# Altium PCB DSP5509_FPGACIII.PcbDoc (part 3 of 3)
Units mm, origin at the board's own origin, x right, y up, seen from the top; angles counter-clockwise.
Board outline 143.99 x 90.04 mm, 2 copper layers (Top Layer, Bottom Layer); 303 components, 256 nets, 1061 pads, 215 vias.
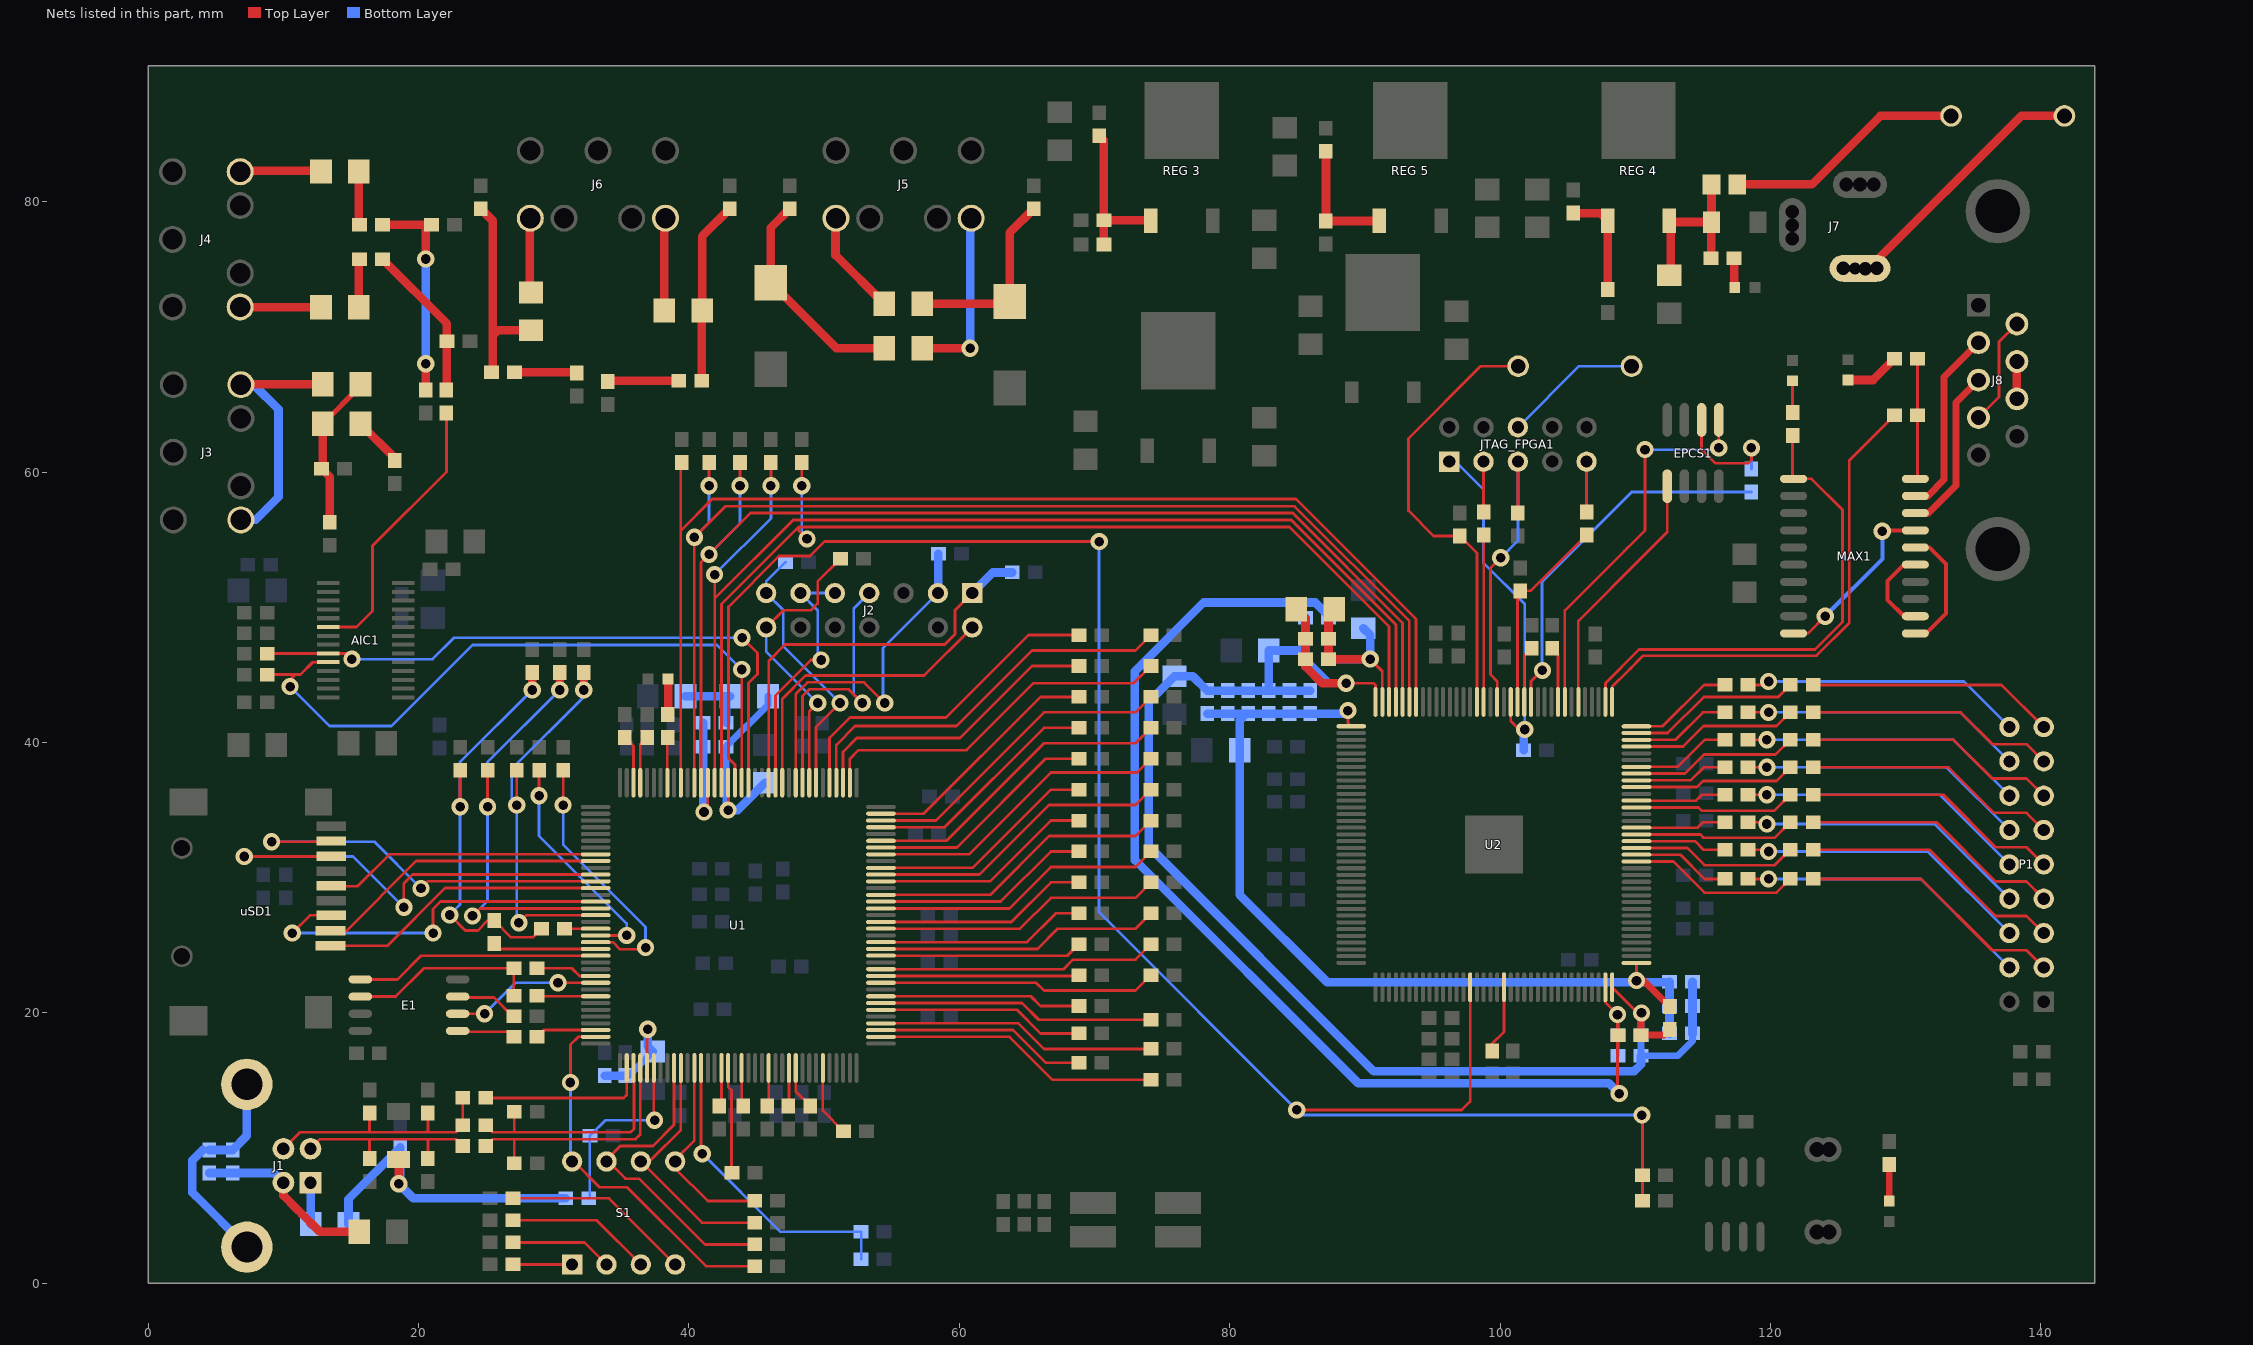
[diagram p3: the nets of this part, all layers, seen from the top]

## Via types
v1: diameter 1.27, hole 0.711, Top Layer to Bottom Layer, 197 vias
v2: diameter 0.66, hole 0.33, Top Layer to Bottom Layer, tented top, 16 vias
v3: diameter 1.5, hole 1, Top Layer to Bottom Layer, 2 vias

## Nets (pads, with @x,y where several pads share a name; then routed paths per layer and width w, separated by ;. In a path a pad name is that pad's centre, name@x,y a point inside that pad or via, vN(x,y) a via of type N, cw(c..) or ccw(c..) an arc to the next point about the centre after c; other vN are vias at no path point) (continued)
NetAIC1_20: AIC1.20 C24.1 | length 20.7
  Top Layer w0.203: AIC1.20@13.364,48.582 AIC1.20@13.323,48.541 15.422,48.541 16.606,49.725 16.606,54.551 22.067,60.012 C24.1@22.067,64.369
NetAIC1_23: AIC1.23 R47.2 U1.89 | length 47.4
  Top Layer w0.203: R47.2@8.82,46.55 8.861,46.591 AIC1.23@13.323,46.591 14.66,46.591 v1(15.082,46.169) ; v1(43.942,47.752) 45.085,46.609 45.085,45.057 44.419,44.391 44.419,37.046 U1.89@44.407,37.034
  Bottom Layer w0.203: v1(15.082,46.169) 21.051,46.169 22.634,47.752 v1(43.942,47.752)
NetAIC1_24: AIC1.24 R48.2 U1.90 | length 52.1
  Top Layer w0.203: R48.2@8.82,45.026 10.891,45.026 ; v1(10.51,44.137) 10.51,44.645 10.891,45.026 ; AIC1.24@13.323,45.941 12.187,45.941 11.272,45.026 10.891,45.026 ; U1.90@43.907,37.034 v1(43.907,45.403)
  Bottom Layer w0.203: v1(10.51,44.137) 13.431,41.216 18.003,41.216 24.008,47.221 42.089,47.221 v1(43.907,45.403)
NetC1_1: C1.1 D1.2 FB1.1 R2.1 | length 24.6
  Top Layer w0.635: v1(18.542,7.366) D1.2@18.542,9.147
  Bottom Layer w0.635: FB1.1@14.831,4.386 14.831,6.234 C1.1@18.669,10.072 18.669,7.493 v1(18.542,7.366) 19.617,6.291 R2.1@30.9,6.291
NetC2_1: C2.1 R5.1 U1.95 | length 9
  Top Layer w0.203: v1(41.117,34.866) 41.407,35.156 U1.95@41.407,37.034 U1.95@41.371,36.998
  Bottom Layer w0.635: R5.1@41.057,41.47 C2.1@41.057,39.692 41.057,35.18 41.057,34.926 v1(41.117,34.866)
NetC2_2: C2.2 C3.2 FB5.1 U1.92 | length 15.3
  Top Layer w0.203: U1.92@42.895,37.022 U1.92@42.907,37.034 v1@42.907,35.132
  Bottom Layer w0.508: v1(42.907,35.005) 42.757,35.155 C2.2@42.757,39.692 45.85,42.785 C3.2@45.85,43.434
  Bottom Layer w0.635: v1(42.907,35.005) 43.62,35.005 FB5.1@45.637,37.022
NetC3_1: C3.1 FB2.2 R5.2 | length 5.4
  Bottom Layer w0.203: R5.2@42.771,41.484 R5.2@42.785,41.47
  Bottom Layer w0.635: FB2.2@39.754,43.434 C3.1@43.05,43.434 42.757,43.141 R5.2@42.757,41.47
NetC4_1: C4.1 J1.3 R1.1 R3.1 R7.1 | length 19
  Top Layer w0.203: J1.3@10.018,9.954 11.24,11.176 16.256,11.176 ; R7.1@16.383,12.612 16.383,11.303 16.256,11.176 ; C4.1@20.701,12.612 20.701,11.303 20.574,11.176 ; R1.1@23.28,13.716 R3.1@23.28,11.684 22.772,11.176 20.574,11.176 ; 16.256,11.176 20.574,11.176
NetC5_1: C5.1 J1.2 R4.1 R8.1 | length 14.7
  Top Layer w0.203: J1.2@12.018,9.954 12.732,10.668 16.256,10.668 ; R8.1@16.383,9.232 16.383,10.541 16.256,10.668 ; C5.1@20.701,9.232 20.701,10.541 20.574,10.668 ; R4.1@23.28,10.16 22.772,10.668 20.574,10.668 ; 16.256,10.668 20.574,10.668
NetC6_1: C6.1 R4.2 U1.4 | length 18.4
  Top Layer w0.203: R4.2@24.98,10.16 25.488,10.668 36.068,10.668 36.407,11.007 U1.4@36.407,15.934 ; C6.1@27.09,8.89 27.09,10.629
NetC7_1: C7.1 R3.2 U1.3 | length 17.2
  Top Layer w0.203: R3.2@24.98,11.684 25.488,11.176 35.687,11.176 35.941,11.43 U1.3@35.941,15.9 ; 27.09,11.215 C7.1@27.09,12.7
NetC8_1: C8.1 C9.1 FB3.1 U1.5 | length 8.9
  Top Layer w0.203: U1.5@36.907,15.934 v1@36.907,18.746
  Bottom Layer w0.508: C9.1@35.306,15.367 35.557,15.367 FB3.1@37.338,17.148
  Bottom Layer w0.635: C8.1@33.782,15.367 C9.1@35.306,15.367 ; v1(36.957,18.796) 36.957,17.529 FB3.1@37.338,17.148
NetC10_1: C10.1 FB4.2 J1.4 R9.2 | length 16.3
  Top Layer w0.635: 10.018,6.619 J1.4@10.018,7.454 10.018,6.492 10.99,5.52 ; 12.446,4.064 11.384,5.126 ; FB4.2@15.618,3.81 12.7,3.81 11.384,5.126 ; 10.99,5.52 11.384,5.126 ; 10.99,5.52 11.384,5.126
  Bottom Layer w0.635: C10.1@4.538,8.164 R9.2@6.26,8.164 9.308,8.164 J1.4@10.018,7.454
NetC10_2: C10.2 J1.5 J1.6 R9.1 | length 16.7
  Bottom Layer w0.203: C10.2@4.05,9.864 C10.2@4.538,9.864
  Bottom Layer w0.635: C10.2@4.05,9.864 3.271,9.085 3.271,6.721 3.502,6.49 J1.5@7.308,2.684 ; C10.2@4.538,9.864 R9.1@6.26,9.864 7.308,10.912 J1.6@7.308,14.724
NetC19_1: C19.1 R28.2 | length 3.8
  Top Layer w0.203: R28.2@18.257,60.862 R28.2@18.257,61.031
  Top Layer w0.635: C19.1@15.72,63.568 R28.2@18.257,61.031
NetC19_2: C19.2 C20.1 FB6.1 R26.2 | length 11.5
  Top Layer w0.203: FB6.1@15.72,66.368 FB6.1@15.72,66.489
  Top Layer w0.381: C19.2@12.92,63.568 FB6.1@15.72,66.368
  Top Layer w0.635: R26.2@12.835,60.266 13.431,59.67 C20.1@13.431,56.29 ; R26.2@12.92,60.351 C19.2@12.92,63.568
NetC23_2: C23.2 R34.2 R43.2 | length 15.4
  Top Layer w0.635: R34.2@17.329,78.3 R43.2@20.963,78.3 ; C23.2@20.543,66.069 v1(20.543,68.013) ; v1(20.543,75.76) R43.2@20.543,77.88
  Bottom Layer w0.635: v1(20.543,68.013) v1(20.543,75.76)
NetC24_2: C24.2 R37.2 R42.2 | length 11.6
  Top Layer w0.635: R37.2@17.329,75.76 22.106,70.983 R42.2@22.106,69.664 C24.2@22.106,66.108
NetC25_2: C25.2 FB9.2 R44.2 | length 16.4
  Top Layer w0.635: R44.2@47.467,79.482 46.07,78.085 C25.2@46.07,74.007 50.921,69.156 FB9.2@54.449,69.156
NetC26_2: C26.2 FB10.2 R45.2 | length 14.1
  Top Layer w0.635: FB10.2@57.249,72.458 63.571,72.458 C26.2@63.723,72.61 63.723,77.704 R45.2@65.501,79.482
NetC28_1: C28.1 R49.1 | length 5.2
  Top Layer w0.635: C28.1@34.044,66.743 R49.1@39.251,66.743
NetC29_1: C29.1 R55.1 | length 4.6
  Top Layer w0.635: R55.1@27.108,67.378 C29.1@31.68,67.378
NetC88_1: "REG 4.3" C88.1 D4.2 F1.2 R66.2 | length 12.5
  Top Layer w0.635: C88.1@112.522,74.552 112.618,74.648 112.618,78.499 115.636,78.499 F1.2@115.636,81.28 ; R66.2@115.609,75.819 115.623,75.833 D4.2@115.623,78.486
NetC91_2: C91.2 C92.2 C93.2 C94.2 C95.2 C96.2 C97.2 C98.2 C99.2 C100.2 C101.2 C102.2 C103.2 C104.2 C105.2 C106.2 C107.2 C108.2 C109.2 C110.2 FB16.1 U2.36 U2.108 | length 114.1
  Top Layer w0.203: v1(88.615,44.391) 90.647,44.391 90.787,44.251 U2.36@90.787,43.003 U2.36@90.787,43.87 ; U2.108@108.287,21.903 v1@110.183,20.007
  Top Layer w0.508: v1@110.42,19.968 C105.2@110.42,18.356 112.11,18.356 C94.2@112.53,18.776
  Top Layer w0.635: C102.2@84.929,49.852 85.606,49.175 C107.2@85.606,47.693 C110.2@85.606,46.169 85.606,45.622 86.837,44.391 v1(88.615,44.391)
  Bottom Layer w0.203: C96.2@81.757,43.844 C97.2@82.9,43.844 C99.2@84.424,43.844 ; C103.2@85.606,49.217 C103.2@85.606,49.344 ; v1@110.42,19.968 v1(110.459,20.007)
  Bottom Layer w0.508: C109.2@85.606,46.169 87.384,44.391 v1(88.615,44.391) ; v1@110.42,19.968 C108.2@110.42,18.356 C104.2@110.42,16.832 113.126,16.832 114.23,17.936 C93.2@114.23,18.483
  Bottom Layer w0.635: C109.2@85.606,46.169 85.606,46.677 ; C103.2@85.606,49.217 C106.2@85.606,47.693 85.606,46.677 ; C101.2@85.948,43.844 C99.2@84.424,43.844 C97.2@82.9,43.844 ; C104.2@110.42,16.832 110.42,16.197 109.912,15.689 90.647,15.689 74.01,32.326 74.01,42.997 C91.2@75.915,44.902 77.27,44.902 C92.2@78.328,43.844 C95.2@79.852,43.844 C96.2@81.376,43.844 C97.2@82.9,43.844 ; C93.2@114.23,18.483 C98.2@114.23,20.515 C100.2@114.23,22.293 ; C97.2@82.9,43.844 82.9,46.801 FB16.1@82.903,46.804 85.479,46.804 85.606,46.677
NetC92_1: C92.1 C93.1 C94.1 C95.1 C96.1 C97.1 C98.1 C99.1 C100.1 C101.1 FB15.1 U2.37 U2.109 | length 74.6
  Top Layer w0.203: U2.37@88.247,41.203 U2.37@88.987,41.203 88.742,41.448 v1(88.742,42.359) ; v1(110.087,22.395) U2.109@110.087,23.703
  Top Layer w0.508: v1(110.087,22.395) 110.611,22.395 C94.1@112.53,20.476
  Bottom Layer w0.203: C95.1@79.979,42.144 81.249,42.144 C96.1@81.376,42.144 81.757,42.144 83.535,42.144 85.44,42.144 ; v1@88.527,42.144 v1(88.742,42.359)
  Bottom Layer w0.635: C92.1@78.328,42.144 C95.1@79.852,42.144 C96.1@81.249,42.144 ; v1@88.527,42.144 C101.1@85.948,42.144 C99.1@84.424,42.144 C97.1@82.9,42.144 C96.1@81.376,42.144 C96.1@81.249,42.144 ; v1(110.087,22.395) v1@109.957,22.265 ; C100.1@112.502,22.265 v1@109.957,22.265 ; C93.1@112.53,18.483 C98.1@112.53,20.515 C100.1@112.53,22.293 ; C96.1@81.249,42.144 80.744,41.639 80.744,39.819 80.744,28.732 87.211,22.265 v1@109.957,22.265
NetC102_1: C102.1 C103.1 C104.1 C105.1 C106.1 C107.1 C108.1 C109.1 C110.1 FB14.1 U2.35 U2.107 | length 104.2
  Top Layer w0.203: v1(90.393,46.169) 91.287,45.275 U2.35@91.287,43.003 ; U2.107@107.787,21.903 107.787,20.774 v1(108.681,19.88) v1@108.681,14.546
  Top Layer w0.635: C102.1@87.729,49.852 87.306,49.429 C107.1@87.306,47.693 C110.1@87.306,46.169 v1(90.393,46.169)
  Bottom Layer w0.203: C103.1@87.306,49.217 C103.1@87.306,49.344 ; v1(90.393,46.169) v1@90.647,46.169 ; C104.1@108.72,16.832 C108.1@108.72,18.356 v1@108.72,19.841
  Bottom Layer w0.635: FB14.1@89.885,48.452 90.393,47.944 v1(90.393,46.169) C109.1@87.306,46.169 C106.1@87.306,47.693 C103.1@87.306,49.217 87.306,49.383 86.329,50.36 78.074,50.36 72.994,45.28 72.994,31.31 89.504,14.8 108.046,14.8 v1(108.808,14.038)
NetD3_1: D3.1 R58.1 | length 2.6
  Top Layer w0.635: R58.1@38.45,42.066 38.469,42.085 D3.1@38.469,44.704
NetD5_1: D5.1 R66.1 | length 2.2
  Top Layer w0.635: R66.1@117.309,75.819 117.309,73.711 D5.1@117.36,73.66
NetD6_2: D6.2 R108.1 | length 2.2
  Top Layer w0.203: R108.1@121.635,64.418 D6.2@121.635,66.655
NetD7_2: D7.2 R109.1 | length 4.1
  Top Layer w0.635: D7.2@125.73,66.814 127.587,66.814 R109.1@129.167,68.394
NetE1_1: E1.1 R27.2 | length 4.6
  Top Layer w0.203: E1.1@22.904,18.61 25.527,18.61 ; 25.789,18.61 25.527,18.61 ; R27.2@27.059,18.229 26.678,18.61 25.527,18.61
NetE1_2: E1.2 U1.135 | length 11.3
  Top Layer w0.203: E1.2@22.904,19.939 v1(24.892,19.939) ; v1@30.136,22.234 v1(30.322,22.234) U1.135@33.107,22.234
  Bottom Layer w0.203: v1(24.892,19.939) 27.187,22.234 v1(30.322,22.234)
NetE1_3: E1.3 R25.2 | length 4.7
  Top Layer w0.203: E1.3@22.904,21.15 25.575,21.15 26.972,19.753 R25.2@27.059,19.753
NetE1_5: E1.5 U1.131 | length 18.9
  Top Layer w0.203: E1.5@15.704,22.479 18.443,22.479 20.198,24.234 24.48,24.234 ; 23.936,24.234 24.48,24.234 ; 26.639,24.234 26.893,24.234 ; U1.131@33.107,24.234 26.893,24.234 ; 24.48,24.234 26.893,24.234
NetE1_6: E1.6 R22.2 R23.2 | length 14.3
  Top Layer w0.203: E1.6@15.704,21.209 18.316,21.209 20.416,23.309 R23.2@27.059,23.309 R22.2@27.059,21.277
NetEPCS1_1: EPCS1.1 U2.8 | length 29.1
  Top Layer w0.203: U2.8@104.787,43.003 104.787,49.768 109.189,54.17 ; 109.443,54.424 109.189,54.17 ; v1(110.713,61.663) 110.713,55.694 109.189,54.17 ; v1(116.174,61.79) EPCS1.1@116.174,63.859
  Bottom Layer w0.203: v1(110.713,61.663) 116.047,61.663 v1(116.174,61.79)
NetEPCS1_2: EPCS1.2 R119.2 | length 8.9
  Top Layer w0.203: EPCS1.2@114.904,63.859 114.904,61.663 115.92,60.647 118.333,60.647 118.587,60.901 v1(118.587,61.79)
  Bottom Layer w0.203: R119.2@118.587,60.227 v1(118.587,61.79)
NetEPCS1_5: EPCS1.5 U2.6 | length 19.3
  Top Layer w0.203: U2.6@105.76,42.976 U2.6@105.787,43.003 105.787,48.99 110.684,53.887 ; 111.085,54.288 110.684,53.887 ; EPCS1.5@112.364,58.959 112.364,55.567 110.684,53.887
NetF1_1: F1.1 S3.2 | length 17.9
  Top Layer w0.635: F1.1@117.536,81.28 123.063,81.28 128.127,86.344 S3.2@133.357,86.344
NetFB1_2: FB1.2 J1.1 | length 3.1
  Bottom Layer w0.635: FB1.2@12.031,4.386 J1.1@12.031,7.441
NetFB6_2: FB6.2 J3.2 J3.5 | length 19.4
  Top Layer w0.635: J3.5@6.997,66.489 FB6.2@12.92,66.489
  Bottom Layer w0.635: J3.2@6.869,56.468 7.954,56.468 9.652,58.166 9.652,64.643 7.827,66.468 J3.5@6.869,66.468
NetFB7_1: FB7.1 R34.1 | length 3.9
  Top Layer w0.635: R34.1@15.593,78.336 FB7.1@15.593,82.237
NetFB7_2: FB7.2 J4.5 | length 5.7
  Top Layer w0.635: J4.5@6.997,82.284 FB7.2@12.746,82.284
NetFB8_1: FB8.1 R37.1 | length 3.5
  Top Layer w0.635: FB8.1@15.593,72.204 R37.1@15.593,75.724
NetFB8_2: FB8.2 J4.2 | length 5.8
  Top Layer w0.635: J4.2@6.997,72.204 FB8.2@12.793,72.204
NetFB9_1: FB9.1 J5.5 | length 12.9
  Top Layer w0.635: FB9.1@57.249,69.156 v1(60.802,69.156)
  Bottom Layer w0.635: v1(60.802,69.156) J5.5@60.802,78.547
NetFB10_1: FB10.1 J5.2 | length 7.6
  Top Layer w0.635: J5.2@50.849,78.594 50.849,76.058 FB10.1@54.449,72.458
NetFB11_1: FB11.1 J6.5 | length 6.7
  Top Layer w0.635: FB11.1@38.193,71.95 38.193,78.544 J6.5@38.243,78.594
NetFB11_2: FB11.2 R49.2 R57.2 | length 13.5
  Top Layer w0.635: R49.2@40.951,66.743 FB11.2@40.951,71.908 ; FB11.2@40.993,71.95 40.993,77.453 R57.2@43.022,79.482
NetFB12_1: FB12.1 J6.2 | length 5.3
  Top Layer w0.635: J6.2@28.243,78.594 28.243,73.36 FB12.1@28.321,73.282
NetFB12_2: FB12.2 R55.2 R56.2 | length 15.5
  Top Layer w0.635: R56.2@24.607,79.482 25.493,78.596 25.493,70.104 ; R55.2@25.408,67.378 25.493,67.463 25.493,70.104 ; FB12.2@28.321,70.482 25.871,70.482 25.493,70.104
NetJ2_1: J2.1 R10.1 U1.86 | length 31.7
  Top Layer w0.203: U1.86@45.904,37.037 U1.86@45.907,37.034 45.907,44.704 ; 45.907,45.593 45.907,45.339 ; J2.1@60.96,51.054 59.69,49.784 59.69,48.006 58.928,47.244 47.117,47.244 45.907,46.034 45.907,45.339 ; 45.907,44.704 45.907,45.339 ; 45.907,44.704 45.907,45.339
  Bottom Layer w0.635: J2.1@60.96,51.054 62.484,52.578 R10.1@63.92,52.578
NetJ2_2: J2.2 U1.84 | length 22.4
  Top Layer w0.203: U1.84@46.907,37.034 46.907,43.224 48.641,44.958 57.404,44.958 J2.2@60.96,48.514
NetJ2_3: J2.3 R11.1 U1.82 | length 27
  Top Layer w0.203: U1.82@47.907,37.034 47.907,43.589 48.768,44.45 52.959,44.45 v1(54.483,42.926)
  Bottom Layer w0.203: v1(54.483,42.926) 54.356,43.053 54.356,46.99 J2.3@58.42,51.054 ; R11.1@58.42,53.555 R11.1@58.459,53.594
  Bottom Layer w0.635: J2.3@58.42,51.054 58.459,51.093 R11.1@58.459,53.975
NetJ2_7: J2.7 U1.81 | length 20.3
  Top Layer w0.203: U1.81@48.407,37.034 48.407,43.434 48.915,43.942 51.816,43.942 v1(52.832,42.926)
  Bottom Layer w0.203: v1(52.832,42.926) 52.197,43.561 52.197,49.911 J2.7@53.34,51.054
NetJ2_9: J2.9 J2.11 U1.85 | length 19
  Top Layer w0.203: U1.85@46.407,37.034 46.407,43.486 49.022,46.101 v1(49.784,46.101)
  Bottom Layer w0.203: v1(49.784,46.101) 49.53,46.355 49.53,49.784 J2.11@48.26,51.054 J2.9@50.8,51.054
NetJ2_13: J2.13 R12.1 U1.79 | length 20.3
  Top Layer w0.203: U1.79@49.407,37.034 49.407,41.152 v1(51.181,42.926)
  Bottom Layer w0.203: 46.99,47.752 46.99,48.133 ; R12.1@47.156,53.34 45.72,51.904 J2.13@45.72,51.054 46.99,49.784 46.99,48.133 ; v1(51.181,42.926) 46.99,47.117 46.99,48.133
NetJ2_14: J2.14 R13.1 U1.80 | length 21.9
  Top Layer w0.203: J2.14@45.72,48.514 46.99,49.784 49.022,49.784 49.53,50.292 49.53,51.904 R13.1@51.22,53.594 ; U1.80@48.907,37.034 48.907,42.303 v1(49.53,42.926)
  Bottom Layer w0.203: J2.14@45.72,48.514 45.72,46.736 v1(49.53,42.926)
NetJ7_1: J7.1 J7.1A J7.1B pad.1 pad.3 S3.1 | length 19.2
  Top Layer w0.635: pad.1@127.254,75.057 138.541,86.344 S3.1@141.739,86.344
NetJ8_2: J8.2 MAX1.19 | length 13.8
  Top Layer w0.508: MAX1.19@130.707,58.234 131.64,58.234 132.842,59.436 132.842,67.03 J8.2@135.384,69.572
NetJ8_3: J8.3 MAX1.18 | length 12.4
  Top Layer w0.508: MAX1.18@130.707,56.964 131.699,56.964 133.731,58.996 133.731,65.149 J8.3@135.384,66.802
NetJ8_4: J8.4 J8.6 | length 8.1
  Top Layer w0.203: J8.4@135.384,64.032 136.906,65.554 136.906,69.639 J8.6@138.224,70.957
NetJ8_7: J8.7 J8.8 | length 2.8
  Top Layer w0.635: J8.8@138.224,65.417 J8.7@138.224,68.187
NetJTAG_FPGA1_1: JTAG_FPGA1.1 R115.1 U2.16 | length 26.7
  Top Layer w0.203: U2.16@100.787,43.003 100.787,41.58 101.405,40.962 v1(101.823,40.962)
  Bottom Layer w0.203: JTAG_FPGA1.1@96.235,60.774 96.706,60.774 98.775,58.705 98.775,53.281 101.823,50.233 v1(101.823,40.962)
  Bottom Layer w0.635: R115.1@101.735,39.438 101.735,40.874 v1(101.823,40.962)
NetJTAG_FPGA1_3: JTAG_FPGA1.3 R113.2 | length 3.7
  Top Layer w0.203: R113.2@98.775,57.052 JTAG_FPGA1.3@98.775,60.774
NetJTAG_FPGA1_5: JTAG_FPGA1.5 R112.1 U2.18 | length 24.9
  Top Layer w0.203: U2.18@99.787,43.003 99.787,44.522 99.283,45.026 99.283,52.9 v1(100.045,53.662) ; R112.1@101.315,57.052 JTAG_FPGA1.5@101.315,60.774
  Bottom Layer w0.203: v1(100.045,53.662) 101.315,54.932 101.315,58.293 ; 101.315,55.948 101.315,58.293 ; JTAG_FPGA1.5@101.315,60.774 101.315,58.293
NetJTAG_FPGA1_6: JTAG_FPGA1.6 S4.2 | length 10.3
  Bottom Layer w0.203: JTAG_FPGA1.6@101.315,63.314 105.835,67.834 S4.2@109.721,67.834
NetJTAG_FPGA1_9: JTAG_FPGA1.9 R114.2 | length 3.7
  Top Layer w0.203: R114.2@106.395,57.052 JTAG_FPGA1.9@106.395,60.774
NetMAX1_1: MAX1.1 R108.2 U2.2 | length 36.9
  Top Layer w0.203: U2.2@107.787,43.003 107.787,44.386 110.287,46.886 123.286,46.886 125.318,48.918 125.318,57.218 123.032,59.504 MAX1.1@121.607,59.504 ; MAX1.1@121.635,59.532 R108.2@121.635,62.718
NetMAX1_10: MAX1.10 MAX1.17 | length 13.5
  Top Layer w0.203: MAX1.10@121.607,48.074 MAX1.10@121.707,48.074 122.778,48.074 v1(124.048,49.344)
  Top Layer w0.305: v1(128.27,55.626) 128.338,55.694 MAX1.17@130.707,55.694
  Bottom Layer w0.305: v1(124.048,49.344) 128.27,53.566 v1(128.27,55.626)
NetMAX1_11: MAX1.11 MAX1.16 | length 9.2
  Top Layer w0.305: MAX1.16@130.707,54.424 131.758,54.424 132.969,53.213 132.969,49.53 131.513,48.074 MAX1.11@130.807,48.074
NetMAX1_12: MAX1.12 MAX1.15 | length 9.2
  Top Layer w0.305: 128.905,50.292 MAX1.12@129.853,49.344 ; 128.905,52.197 MAX1.15@129.862,53.154 ; MAX1.12@130.707,49.344 MAX1.12@129.853,49.344 ; MAX1.15@130.707,53.154 MAX1.15@129.862,53.154 ; MAX1.12@129.853,49.344 128.651,50.546 128.651,51.943 MAX1.15@129.862,53.154
NetMAX1_20: MAX1.20 R109.2 R111.2 | length 8.8
  Top Layer w0.203: MAX1.20@130.867,59.564 R111.2@130.867,64.203 R109.2@130.867,68.394
NetP1_4: P1.4 R134.2 | length 22
  Top Layer w0.203: R134.2@118.333,29.913 v1(119.857,29.913)
  Bottom Layer w0.203: v1(119.857,29.913) 131.123,29.913 P1.4@137.668,23.368
NetP1_6: P1.6 R132.2 | length 21.9
  Top Layer w0.203: R132.2@118.333,32.072 119.73,32.072 v1(119.857,31.945)
  Bottom Layer w0.203: v1(119.857,31.945) 131.631,31.945 P1.6@137.668,25.908
NetP1_8: P1.8 R130.2 | length 21.7
  Top Layer w0.203: R130.2@118.333,34.104 119.603,34.104 v1(119.73,33.977)
  Bottom Layer w0.203: v1(119.73,33.977) 132.139,33.977 P1.8@137.668,28.448
NetP1_10: P1.10 R128.2 | length 21.5
  Top Layer w0.203: R128.2@118.333,36.136 v1(119.73,36.136)
  Bottom Layer w0.203: v1(119.73,36.136) 132.52,36.136 P1.10@137.668,30.988
NetP1_12: P1.12 R126.2 | length 21.3
  Top Layer w0.203: R126.2@118.333,38.168 v1(119.73,38.168)
  Bottom Layer w0.203: v1(119.73,38.168) 133.028,38.168 P1.12@137.668,33.528
NetP1_14: P1.14 R124.2 | length 21
  Top Layer w0.203: R124.2@118.333,40.2 v1(119.73,40.2)
  Bottom Layer w0.203: v1(119.73,40.2) 133.536,40.2 P1.14@137.668,36.068
NetP1_16: P1.16 R122.2 | length 20.8
  Top Layer w0.203: R122.2@118.333,42.232 v1(119.857,42.232)
  Bottom Layer w0.203: v1(119.857,42.232) 134.044,42.232 P1.16@137.668,38.608
NetP1_18: P1.18 R120.2 | length 20.7
  Top Layer w0.203: R120.2@118.333,44.264 v1@119.857,44.264
  Bottom Layer w0.203: v1(119.857,44.518) 134.298,44.518 P1.18@137.668,41.148
NetR1_2: R1.2 U1.2 | length 13.6
  Top Layer w0.203: R1.2@24.98,13.716 35.179,13.716 35.407,13.944 U1.2@35.407,15.934 35.407,14.805
NetR2_2: R2.2 R6.1 U1.6 | length 13.8
  Top Layer w0.203: U1.6@37.407,15.934 37.407,12.123 v1(37.465,12.065)
  Bottom Layer w0.203: R2.2@32.6,6.291 32.678,6.369 R6.1@32.678,10.922 33.821,12.065 v1(37.465,12.065)
NetR14_1: R14.1 S1.8 U1.143 | length 30.5
  Top Layer w0.203: v1(31.242,14.859) 31.242,17.653 31.823,18.234 U1.143@33.107,18.234 ; S1.8@31.432,9.08 33.401,7.112 35.433,7.112 41.275,1.27 R14.1@44.87,1.27
  Bottom Layer w0.203: 31.242,11.811 v1(31.242,14.859) 31.242,9.144 S1.8@31.369,9.017
NetR15_1: R15.1 S1.7 U1.9 | length 23.8
  Top Layer w0.203: U1.9@38.907,15.934 38.907,11.729 37.338,10.16 34.925,10.16 33.909,9.144 35.306,7.747 36.322,7.747 41.19,2.879 R15.1@44.87,2.879
NetR16_1: R16.1 S1.6 U1.10 | length 18.8
  Top Layer w0.203: S1.6@36.449,9.144 37.211,9.144 39.407,11.34 U1.10@39.407,15.934 ; S1.6@36.576,9.144 36.576,8.89 40.979,4.487 R16.1@44.87,4.487
NetR17_1: R17.1 S1.5 U1.12 | length 14.9
  Top Layer w0.203: U1.12@40.407,15.934 40.407,10.562 38.989,9.144 38.989,8.509 41.402,6.096 R17.1@44.87,6.096
NetR18_2: R18.2 S1.1 | length 4.4
  Top Layer w0.203: R18.2@26.981,1.397 S1.1@31.369,1.397
NetR19_2: R19.2 S1.2 | length 7.6
  Top Layer w0.203: R19.2@26.981,3.028 32.278,3.028 S1.2@33.909,1.397
NetR20_2: R20.2 S1.3 | length 10.8
  Top Layer w0.203: R20.2@26.981,4.66 33.186,4.66 S1.3@36.449,1.397
NetR21_2: R21.2 S1.4 | length 14
  Top Layer w0.203: R21.2@26.981,6.291 34.095,6.291 S1.4@38.989,1.397
NetR22_1: R22.1 U1.137 | length 4.4
  Top Layer w0.203: R22.1@28.759,21.277 28.802,21.234 U1.137@33.107,21.234
NetR23_1: R23.1 U1.134 | length 4.6
  Top Layer w0.203: R23.1@28.759,23.309 31.338,23.309 31.913,22.734 U1.134@33.107,22.734
NetR24_1: R24.1 R29.2 U1.124 | length 33.7
  Top Layer w0.203: v1(24.003,27.178) 24.559,27.734 26.512,27.734 ; v1(25.115,35.247) R29.2@25.115,37.953 ; 25.527,27.734 26.512,27.734 ; U1.124@33.107,27.734 26.512,27.734
  Top Layer w0.635: v1(30.449,43.883) R24.1@30.449,45.192
  Bottom Layer w0.203: v1(24.003,27.178) 25.115,28.29 v1(25.115,35.247) 25.115,38.549 v1(30.449,43.883)
NetR27_1: R27.1 U1.142 | length 4.6
  Top Layer w0.203: R27.1@28.759,18.229 29.264,18.734 U1.142@33.107,18.734
NetR30_1: R30.1 R36.2 U1.125 | length 29.3
  Top Layer w0.203: v1(27.274,35.374) R36.2@27.274,37.953 ; v1(27.432,26.67) 27.996,27.234 U1.125@33.107,27.234 U1.125@33.095,27.246
  Top Layer w0.635: v1(32.227,43.883) R30.1@32.227,45.192
  Bottom Layer w0.203: v1@26.893,35.374 26.893,38.041 32.227,43.375 v1(32.227,43.883) ; v1(27.274,35.374) 27.274,26.828 v1(27.432,26.67)
NetR31_1: R31.1 R32.1 R33.1 R38.2 | length 32.5
  Top Layer w0.203: v1(22.321,27.246) 23.464,26.103 24.392,26.103 25.115,26.826 ; v1(23.083,35.247) R38.2@23.083,37.953 R38.2@23.083,37.66 ; R31.1@25.623,26.826 26.854,25.595 27.655,25.595 ; 27.401,25.595 27.655,25.595 ; R33.1@29.091,26.23 28.456,25.595 27.655,25.595
  Top Layer w0.635: v1(28.417,43.883) R32.1@28.417,45.192
  Bottom Layer w0.203: v1(22.321,27.246) 23.083,28.008 23.083,30.48 ; 23.083,29.532 23.083,30.48 ; v1(28.417,43.883) 23.083,38.549 v1(23.083,35.247) 23.083,30.48
NetR31_2: R31.2 U1.130 | length 7.6
  Top Layer w0.203: R31.2@25.623,25.126 26.015,24.734 U1.130@33.107,24.734
NetR33_2: R33.2 U1.127 | length 2.3
  Top Layer w0.203: R33.2@30.791,26.23 33.103,26.23 U1.127@33.107,26.234
NetR35_2: R35.2 U1.129 | length 20.3
  Top Layer w0.203: v1@30.576,35.247 v1(30.703,35.374) R35.2@30.703,37.953 ; U1.129@33.107,25.234 34.386,25.234 34.914,24.706 35.656,24.706 ; 35.148,24.706 35.656,24.706 ; v1(36.799,24.833) 36.672,24.706 35.656,24.706
  Bottom Layer w0.203: v1(30.703,35.374) 30.703,32.453 36.799,26.357 v1(36.799,24.833)
NetR39_2: R39.2 U1.128 | length 17.2
  Top Layer w0.203: v1(28.925,36.068) R39.2@28.925,37.953 ; U1.128@33.107,25.734 v1(35.402,25.734)
  Bottom Layer w0.203: v1(28.925,36.068) 28.925,33.088 35.402,26.611 v1(35.402,25.734)
NetR46_1: R46.1 RESET.1 | length 2.7
  Top Layer w0.508: RESET.1@128.778,6.084 R46.1@128.778,8.802
NetR50_1: R50.1 U1.93 U2.34 | length 80.9
  Top Layer w0.203: U1.93@42.407,37.034 42.407,50.253 48.102,55.948 ; v1(48.356,58.996) R50.1@48.356,60.725 ; v1(48.737,55.059) 48.102,55.694 48.102,55.948 ; U2.34@91.787,43.003 91.79,43.006 91.79,48.582 84.424,55.948 48.102,55.948 ; R50.1@48.356,60.725 48.356,60.901 R50.1@48.356,60.725
  Bottom Layer w0.203: v1(48.356,58.996) 48.356,55.44 v1(48.737,55.059)
NetR51_1: R51.1 U1.94 U2.33 | length 87.1
  Top Layer w0.203: U1.94@41.907,37.034 41.907,50.642 ; v1(41.907,52.42) 41.907,50.642 ; v1(46.07,58.996) R51.1@46.07,60.725 ; U2.33@92.287,43.003 92.298,43.014 92.298,48.709 84.551,56.456 47.721,56.456 41.907,50.642
  Bottom Layer w0.203: v1(41.907,52.42) 46.07,56.583 v1(46.07,58.996)
NetR52_1: R52.1 U1.96 U2.32 | length 87.2
  Top Layer w0.203: U1.96@40.907,37.034 40.907,52.265 ; 40.907,52.773 40.907,52.265 ; v1(43.784,58.996) R52.1@43.784,60.725 ; U2.32@92.787,43.003 92.787,48.855 84.666,56.976 44.558,56.976 v1(41.498,53.916) 40.907,53.325 40.907,52.265
  Bottom Layer w0.203: v1(41.498,53.916) 43.784,56.202 v1(43.784,58.996)
NetR53_1: R53.1 U1.97 U2.31 | length 87.5
  Top Layer w0.203: U1.97@40.407,37.034 v1(40.407,55.186) 42.693,57.472 84.805,57.472 93.287,48.99 U2.31@93.287,43.003 U2.31@93.314,43.03 ; v1(41.498,58.996) R53.1@41.498,60.725
  Bottom Layer w0.203: v1(40.407,55.186) 41.498,56.277 v1(41.498,58.996)
NetR54_1: R54.1 U1.99 U2.30 | length 89
  Top Layer w0.203: U1.99@39.407,37.034 39.407,55.694 ; R54.1@39.466,60.666 R54.1@39.466,60.725 39.407,60.666 39.407,55.694 ; U2.30@93.822,43.038 U2.30@93.787,43.003 93.787,49.125 84.896,58.017 41.73,58.017 39.407,55.694
NetR58_2: R58.2 U1.101 | length 3.3
  Top Layer w0.203: U1.101@38.407,37.034 38.407,40.323 R58.2@38.45,40.366
NetR59_2: R59.2 R60.2 U1.13 | length 22.6
  Top Layer w0.203: U1.13@40.907,15.934 40.902,15.929 40.902,9.681 v1(40.99,9.593)
  Bottom Layer w0.203: v1(40.99,9.593) 46.773,3.81 R59.2@52.744,3.81 R60.2@52.744,1.778
NetR61_2: R61.2 U1.105 | length 3.5
  Top Layer w0.203: U1.105@36.407,37.034 36.407,39.847 R61.2@36.926,40.366
NetR62_2: R62.2 U1.106 | length 3.6
  Top Layer w0.203: R62.2@35.275,40.366 35.907,39.734 U1.106@35.907,37.034
NetR63_1: "REG 3.1" R63.1 R64.2 R65.2 | length 11.7
  Top Layer w0.635: R63.1@70.358,84.875 70.7,84.533 R65.2@70.7,78.613 ; R64.2@70.7,76.835 R65.2@70.7,78.613 ; 74.169,78.596 74.152,78.613 R65.2@70.7,78.613
NetR67_1: "REG 4.1" R67.1 R68.2 | length 7.9
  Top Layer w0.635: R67.1@105.41,79.16 107.387,79.16 107.951,78.596 107.951,73.495 R68.2@107.95,73.494
NetR69_1: "REG 5.1" R69.1 R70.2 | length 9.1
  Top Layer w0.635: R69.1@87.122,83.732 R70.2@87.122,78.574 91.038,78.574 91.06,78.596
NetR71_2: R71.2 U1.57 | length 21.7
  Top Layer w0.203: U1.57@54.207,27.734 63.703,27.734 66.771,30.802 73.033,30.802 R71.2@74.176,31.945
NetR72_1: R72.1 U1.67 | length 23.4
  Top Layer w0.203: U1.67@54.207,32.734 59.051,32.734 66.263,39.946 73.033,39.946 R72.1@74.176,41.089
NetR73_2: R73.2 U1.58 | length 16.2
  Top Layer w0.203: U1.58@54.235,28.262 U1.58@54.207,28.234 63.06,28.234 66.771,31.945 R73.2@68.842,31.945
NetR74_1: R74.1 U1.69 | length 17.7
  Top Layer w0.203: U1.69@54.207,33.734 58.908,33.734 66.263,41.089 R74.1@68.842,41.089
NetR75_2: R75.2 U1.59 | length 22.2
  Top Layer w0.203: U1.59@54.207,28.734 62.29,28.734 66.644,33.088 73.033,33.088 R75.2@74.176,34.231
NetR76_1: R76.1 U1.70 | length 23.8
  Top Layer w0.203: U1.70@54.207,34.234 58.265,34.234 66.263,42.232 73.033,42.232 R76.1@74.176,43.375
NetR77_2: R77.2 U1.61 | length 16.5
  Top Layer w0.203: U1.61@54.207,29.734 62.274,29.734 66.771,34.231 R77.2@68.842,34.231
NetR78_1: R78.1 U1.71 | length 18.2
  Top Layer w0.203: U1.71@54.207,34.734 57.368,34.734 66.009,43.375 R78.1@68.842,43.375
NetR79_2: R79.2 U1.62 | length 22.6
  Top Layer w0.203: U1.62@54.207,30.234 61.504,30.234 66.644,35.374 73.033,35.374 R79.2@74.176,36.517
NetR80_1: R80.1 U1.74 | length 26.9
  Top Layer w0.203: U1.74@51.907,37.034 51.907,38.798 52.547,39.438 60.548,39.438 65.501,44.391 72.906,44.391 R80.1@74.176,45.661
NetR81_2: R81.2 U1.63 | length 17
  Top Layer w0.203: U1.63@54.207,30.734 60.988,30.734 66.771,36.517 R81.2@68.842,36.517
NetR82_1: R82.1 U1.75 | length 22.3
  Top Layer w0.203: U1.75@51.407,37.034 51.407,39.314 52.42,40.327 60.04,40.327 65.374,45.661 R82.1@68.842,45.661
NetR83_2: R83.2 U1.65 | length 22.9
  Top Layer w0.203: U1.65@54.207,31.734 60.718,31.734 66.771,37.787 73.16,37.787 R83.2@74.176,38.803
NetR84_1: R84.1 U1.76 | length 29.4
  Top Layer w0.203: U1.76@50.907,37.034 50.907,39.83 52.293,41.216 59.786,41.216 65.374,46.804 73.033,46.804 R84.1@74.176,47.947
NetR85_2: R85.2 U1.66 | length 17.4
  Top Layer w0.203: U1.66@54.207,32.234 59.821,32.234 66.39,38.803 R85.2@68.842,38.803
NetR86_1: R86.1 U1.77 | length 24.9
  Top Layer w0.203: U1.77@50.407,37.034 50.407,40.346 51.912,41.851 59.024,41.851 65.12,47.947 R86.1@68.842,47.947
NetR87_2: R87.2 U1.31 | length 5.3
  Top Layer w0.203: U1.31@49.907,15.934 49.907,12.78 R87.2@51.443,11.244
NetR88_2: R88.2 U1.17 | length 8.1
  Top Layer w0.203: U1.17@42.907,15.934 42.907,14.534 43.149,14.292 R88.2@43.149,7.981
NetR89_1: R89.1 U1.55 | length 15.8
  Top Layer w0.203: U1.55@54.207,26.734 63.846,26.734 66.771,29.659 R89.1@68.842,29.659
NetR90_2: R90.2 U1.16 | length 2.9
  Top Layer w0.203: R90.2@42.26,13.11 42.407,13.257 U1.16@42.407,15.934 U1.16@42.387,15.914
NetR91_1: R91.1 U1.54 | length 21.4
  Top Layer w0.203: U1.54@54.207,26.234 64.489,26.234 66.771,28.516 73.033,28.516 R91.1@74.176,29.659
NetR92_2: R92.2 U1.19 | length 2.9
  Top Layer w0.203: R92.2@43.907,13.114 R92.2@43.911,13.11 ; U1.19@43.911,15.93 U1.19@43.907,15.934 43.907,13.241 R92.2@44.038,13.11
NetR93_1: R93.1 U1.52 | length 15.5
  Top Layer w0.203: U1.52@54.207,25.234 65.013,25.234 67.152,27.373 R93.1@68.842,27.373
NetR94_1: R94.1 U1.51 | length 21.1
  Top Layer w0.203: U1.51@54.207,24.734 65.783,24.734 67.279,26.23 73.033,26.23 R94.1@74.176,27.373
NetR95_1: R95.1 U1.50 | length 15
  Top Layer w0.203: U1.50@54.207,24.234 67.989,24.234 R95.1@68.842,25.087
NetR96_1: R96.1 U1.48 | length 20.7
  Top Layer w0.203: U1.48@54.207,23.234 67.712,23.234 68.422,23.944 73.033,23.944 R96.1@74.176,25.087
NetR97_1: R97.1 U1.47 | length 14.7
  Top Layer w0.203: U1.47@54.207,22.734 68.775,22.734 R97.1@68.842,22.801
NetR98_2: R98.2 U1.23 | length 2.9
  Top Layer w0.203: R98.2@45.816,13.11 45.907,13.201 U1.23@45.907,15.934
NetR99_1: R99.1 U1.46 | length 20.7
  Top Layer w0.203: U1.46@54.207,22.234 65.687,22.234 66.263,21.658 73.033,21.658 R99.1@74.176,22.801
NetR100_1: R100.1 U1.44 | length 14.9
  Top Layer w0.203: U1.44@54.207,21.234 65.29,21.234 66.009,20.515 R100.1@68.842,20.515
NetR101_1: R101.1 U1.43 | length 20.5
  Top Layer w0.203: U1.43@54.242,20.769 U1.43@54.207,20.734 64.647,20.734 65.882,19.499 R101.1@74.176,19.499
NetR102_1: R102.1 U1.42 | length 15.4
  Top Layer w0.203: U1.42@54.207,20.234 64.258,20.234 66.009,18.483 R102.1@68.842,18.483
NetR103_2: R103.2 U1.26 | length 2.9
  Top Layer w0.203: R103.2@47.34,13.11 47.407,13.177 U1.26@47.407,15.934
NetR104_1: R104.1 U1.40 | length 20.8
  Top Layer w0.203: U1.40@54.207,19.234 64.369,19.234 66.263,17.34 R104.1@74.176,17.34
NetR105_2: R105.2 U1.27 | length 3.3
  Top Layer w0.203: U1.27@47.907,15.934 47.907,14.194 R105.2@48.991,13.11
NetR106_1: R106.1 U1.39 | length 15.6
  Top Layer w0.203: U1.39@54.207,18.734 63.98,18.734 66.39,16.324 R106.1@68.842,16.324
NetR107_1: R107.1 U1.38 | length 21.3
  Top Layer w0.203: U1.38@54.207,18.234 63.718,18.234 66.898,15.054 R107.1@74.176,15.054
NetR110_1: R110.1 R114.1 U2.15 | length 18.2
  Top Layer w0.203: U2.15@101.287,43.003 101.287,51.034 R110.1@101.473,51.22 102.263,51.22 R114.1@106.395,55.352 104.109,53.066
NetR111_1: R111.1 U2.1 | length 37.7
  Top Layer w0.203: U2.1@108.287,43.003 108.287,44.124 109.463,45.3 ; 109.697,45.534 109.463,45.3 ; R111.1@129.167,64.203 125.826,60.862 125.826,48.836 123.413,46.423 110.586,46.423 109.463,45.3
NetR113_1: R113.1 U2.20 | length 12.4
  Top Layer w0.203: U2.20@98.787,43.003 R113.1@98.787,55.452
NetR116_2: R116.2 U2.92 | length 5.1
  Top Layer w0.203: R116.2@99.41,17.174 99.41,17.721 100.287,18.598 U2.92@100.287,21.903
NetR117_2: R117.2 U2.14 | length 4.2
  Top Layer w0.203: U2.14@101.787,43.003 101.787,46.426 R117.2@102.331,46.97
NetR118_2: R118.2 U2.9 | length 4.1
  Top Layer w0.203: R118.2@103.855,46.97 104.287,46.538 U2.9@104.287,43.003
NetR119_1: R119.1 U2.13 | length 28.6
  Top Layer w0.203: U2.13@102.287,44.093 U2.13@102.287,43.003 102.287,44.533 v1@103.093,45.339
  Bottom Layer w0.203: v1@103.093,45.339 103.093,51.884 109.736,58.527 R119.1@118.587,58.527
  other v1: 103.124,45.339
NetR120_1: R120.1 U2.144 | length 7.8
  Top Layer w0.203: U2.144@110.087,41.203 112.014,41.203 115.075,44.264 R120.1@116.633,44.264
NetR121_1: R121.1 U2.143 | length 12.8
  Top Layer w0.203: U2.143@110.087,40.703 112.395,40.703 115.067,43.375 120.57,43.375 R121.1@121.459,44.264
NetR122_1: R122.1 U2.142 | length 7.4
  Top Layer w0.203: U2.142@110.087,40.203 112.974,40.203 115.003,42.232 115.92,42.232 R122.1@116.633,42.232
NetR123_1: R123.1 U2.141 | length 12.4
  Top Layer w0.203: U2.141@110.087,39.703 113.538,39.703 115.051,41.216 120.443,41.216 R123.1@121.459,42.232
NetR124_1: R124.1 U2.138 | length 7.4
  Top Layer w0.203: U2.138@110.087,38.203 113.133,38.203 115.13,40.2 R124.1@116.633,40.2
NetR125_1: R125.1 U2.137 | length 12.4
  Top Layer w0.203: U2.137@110.087,37.703 113.665,37.703 115.073,39.111 120.37,39.111 R125.1@121.459,40.2
NetR126_1: R126.1 U2.136 | length 6.9
  Top Layer w0.203: U2.136@110.087,37.203 114.097,37.203 115.062,38.168 R126.1@116.633,38.168
NetR127_1: R127.1 U2.135 | length 12
  Top Layer w0.203: U2.135@110.087,36.703 114.554,36.703 115.003,37.152 120.443,37.152 R127.1@121.459,38.168
NetR128_1: R128.1 U2.133 | length 6.7
  Top Layer w0.203: U2.133@110.087,35.703 114.502,35.703 114.935,36.136 R128.1@116.633,36.136
NetR129_1: R129.1 U2.132 | length 12
  Top Layer w0.203: U2.132@110.087,35.203 113.507,35.203 114.681,35.203 114.935,34.949 120.272,34.949 R129.1@121.459,36.136
NetR130_1: R130.1 U2.129 | length 6.7
  Top Layer w0.203: U2.129@110.087,33.703 114.602,33.703 115.003,34.104 R130.1@116.633,34.104
NetR131_1: R131.1 U2.128 | length 12
  Top Layer w0.203: U2.128@110.087,33.203 114.808,33.203 115.062,32.949 120.304,32.949 R131.1@121.459,34.104
NetR132_1: R132.1 U2.127 | length 6.8
  Top Layer w0.203: U2.127@110.087,32.703 114.427,32.703 115.058,32.072 R132.1@116.633,32.072
NetR133_1: R133.1 U2.126 | length 12.4
  Top Layer w0.203: U2.126@110.087,32.203 113.847,32.203 115.121,30.929 120.316,30.929 R133.1@121.459,32.072
NetR134_1: R134.1 U2.125 | length 7.3
  Top Layer w0.203: U2.125@110.087,31.703 113.331,31.703 115.121,29.913 R134.1@116.633,29.913
NetR135_1: R135.1 U2.124 | length 12.7
  Top Layer w0.203: U2.124@110.087,31.203 112.815,31.203 115.121,28.897 120.443,28.897 R135.1@121.459,29.913
NetR145_2: R145.2 R146.1 U1.91 U2.87 | length 144.3
  Top Layer w0.203: U1.91@43.407,37.034 43.407,38.354 42.926,38.835 42.926,50.038 46.677,53.789 48.963,53.789 50.038,54.864 v1(70.358,54.864) ; v1(84.963,12.827) 97.155,12.827 97.787,13.459 U2.87@97.787,21.903 ; R146.1@110.529,6.096 R145.2@110.529,8.001 v1@110.529,12.446
  Bottom Layer w0.203: v1@70.327,54.864 70.327,27.463 v1(84.963,12.827) 85.344,12.446 87.98,12.446 v1(110.49,12.446)
NetR147_1: R147.1 S4.1 U2.21 | length 33.1
  Top Layer w0.203: U2.21@98.287,43.003 98.287,54.025 R147.1@97.028,55.284 95.084,55.284 93.218,57.15 93.218,62.484 98.568,67.834 S4.1@101.339,67.834
NetU1_116: U1.116 uSD1.5 | length 20.3
  Top Layer w0.203: uSD1.5@13.815,29.368 15.494,29.368 17.86,31.734 20.035,31.734 U1.116@33.107,31.734
NetU1_117: U1.117 uSD1.2 | length 21.7
  Top Layer w0.203: uSD1.2@13.538,26.035 14.63,26.035 19.829,31.234 20.695,31.234 U1.117@33.107,31.234
NetU1_119: U1.119 uSD1.7 | length 36.3
  Top Layer w0.203: v1(7.112,31.568) uSD1.7@13.815,31.568 ; v1(18.923,27.813) 18.923,29.591 19.566,30.234 U1.119@33.107,30.234
  Bottom Layer w0.203: v1(7.112,31.568) 15.168,31.568 v1(18.923,27.813)
NetU1_120: U1.120 uSD1.8 | length 30.5
  Top Layer w0.203: v1(9.144,32.668) uSD1.8@13.815,32.668 ; v1(20.193,29.21) 20.717,29.734 21.94,29.734 ; 21.733,29.734 21.94,29.734 ; U1.120@33.107,29.734 21.94,29.734
  Bottom Layer w0.203: v1(9.144,32.668) 16.735,32.668 v1(20.193,29.21)
NetU1_121: U1.121 uSD1.1 | length 22
  Top Layer w0.203: 14.681,24.968 13.765,24.968 17.705,24.968 21.971,29.234 U1.121@33.107,29.234
NetU1_123: U1.123 uSD1.3 | length 28.1
  Top Layer w0.203: v1(10.668,25.908) 11.978,27.218 uSD1.3@13.815,27.218 ; v1(21.082,25.908) 21.082,27.686 21.63,28.234 U1.123@33.107,28.234
  Bottom Layer w0.203: v1(10.668,25.908) v1(21.082,25.908)
P1_4: P1.17 R121.2 | length 18.3
  Top Layer w0.203: R121.2@123.159,44.264 137.092,44.264 P1.17@140.208,41.148
P1_6: P1.15 R123.2 | length 18.6
  Top Layer w0.203: R123.2@123.159,42.232 134.044,42.232 136.398,39.878 138.938,39.878 P1.15@140.208,38.608
P1_8: P1.13 R125.2 | length 18.8
  Top Layer w0.203: R125.2@123.159,40.2 133.536,40.2 136.398,37.338 138.938,37.338 P1.13@140.208,36.068
P1_10: P1.11 R127.2 | length 19
  Top Layer w0.203: R127.2@123.159,38.168 133.155,38.168 136.525,34.798 138.938,34.798 P1.11@140.208,33.528
P1_12: P1.9 R129.2 | length 19.2
  Top Layer w0.203: R129.2@123.159,36.136 132.774,36.136 136.652,32.258 138.938,32.258 P1.9@140.208,30.988
P1_14: P1.7 R131.2 | length 19.4
  Top Layer w0.203: R131.2@123.159,34.104 132.266,34.104 136.652,29.718 138.938,29.718 P1.7@140.208,28.448
P1_16: P1.5 R133.2 | length 19.8
  Top Layer w0.203: R133.2@123.286,31.945 R133.2@123.159,32.072 131.758,32.072 136.652,27.178 138.938,27.178 P1.5@140.208,25.908
P1_18: P1.3 R135.2 | length 19.8
  Top Layer w0.203: R135.2@123.159,29.913 131.123,29.913 136.398,24.638 138.938,24.638 P1.3@140.208,23.368
pads on no net: ADM.5 ADM.6 ADM.8 AIC1.2 AIC1.25 AIC1.26 J2.6 J3.0 J3.3 J3.4 J4.0 J4.1 J4.3 J4.4 J5.0 J5.1 J5.3 J5.4 J6.0 J6.1 J6.3 J6.4 J8.1 J8.9 JTAG_FPGA1.7 JTAG_FPGA1.8 MAX1.2 MAX1.3 MAX1.4 MAX1.5 MAX1.8 MAX1.13 MAX1.14 U1.14 U1.15 U1.21 U1.22 U1.25 U1.28 U1.32 U1.34 U1.35 U1.111 U1.133 U1.136 U1.140 U1.141 U2.3 U2.4 U2.7 U2.10 U2.11 U2.22 U2.23 U2.24 U2.25 U2.28 U2.79 U2.80 U2.86 U2.110 U2.111 U2.112 U2.113 U2.114 U2.115 U2.119 U2.120 U2.121 uSD1.0 Y1.1
copper on no net:
  other v2: 97.737,30.653 98.937,30.653 100.137,30.653 101.337,30.653 97.737,31.853 98.937,31.853 100.137,31.853 101.337,31.853 97.737,33.053 98.937,33.053 100.137,33.053 101.337,33.053 97.737,34.253 98.937,34.253 100.137,34.253 101.337,34.253

## Keep-outs
Keep-Out Layer:
  the board outline again, w0.254

## Other copper
Top Layer:
  rectangle net +3.3V: 66.167,65.913 84.074,74.244
  rectangle net +5V: 97.79,82.931 122.555,89.154

## Silkscreen, mask and mechanical layers (free items; w line width, h text height)
Top Overlay:
  drawing of 716 lines, arcs and shapes, not listed
  text "Head Phone" at 41.91,88.138 h1.52
  text "Line Out" at 21.717,87.249 h1.52
  text "Line In" at 2.667,85.217 h1.52
  text "ON  : AS" at 99.365,72.39 h1.52
  text "OFF: JTAG" at 99.441,70.993 h1.52
  text "Rx" at 124.968,69.469 h1.52
  text "Tx" at 120.904,69.342 h1.52
  text "Microphone" at 0.762,68.326 h1.52
  text "Amirhossein" at 61.214,55.753 h5.08
  text "Rostami" at 64.389,51.943 h5.08
Bottom Overlay:
  drawing of 308 lines, arcs and shapes, not listed
  text "JTAG: 1347" at 47.574,5.791 h1.52
  text "E2PROM(24-bit):1246" at 47.574,4.394 h1.52
  text "E2PROM(16-bit):1256" at 47.523,3.023 h1.52

## Text inside footprints (layer, text, board x,y; h text height)
J2: Top Overlay "2" at 62.611,47.879 h1.27; Top Overlay "1" at 62.738,50.8 h1.27; Top Overlay "14" at 42.407,48.26 h1.27; Top Overlay "13" at 42.291,50.546 h1.27
J8: Top Overlay "1" at 131.929,72.592 h1.5 r270; Top Overlay "5" at 131.929,61.762 h1.5 r270; Top Overlay "9" at 141.224,62.992 h1.5 r270; Top Overlay "6" at 141.329,71.457 h1.5 r270
JTAG_FPGA1: Top Overlay "2" at 93.695,62.806 h1.27; Top Overlay "1" at 94.203,60.266 h1.27; Top Overlay "9" at 107.919,60.266 h1.27; Top Overlay "10" at 107.919,62.806 h1.27
P1: Top Overlay "1" at 140.081,18.593 h1; Top Overlay "17" at 139.827,42.926 h1